# EAGLE board holo clock attiny with buttons rotate 90 (EAGLE 6.2)
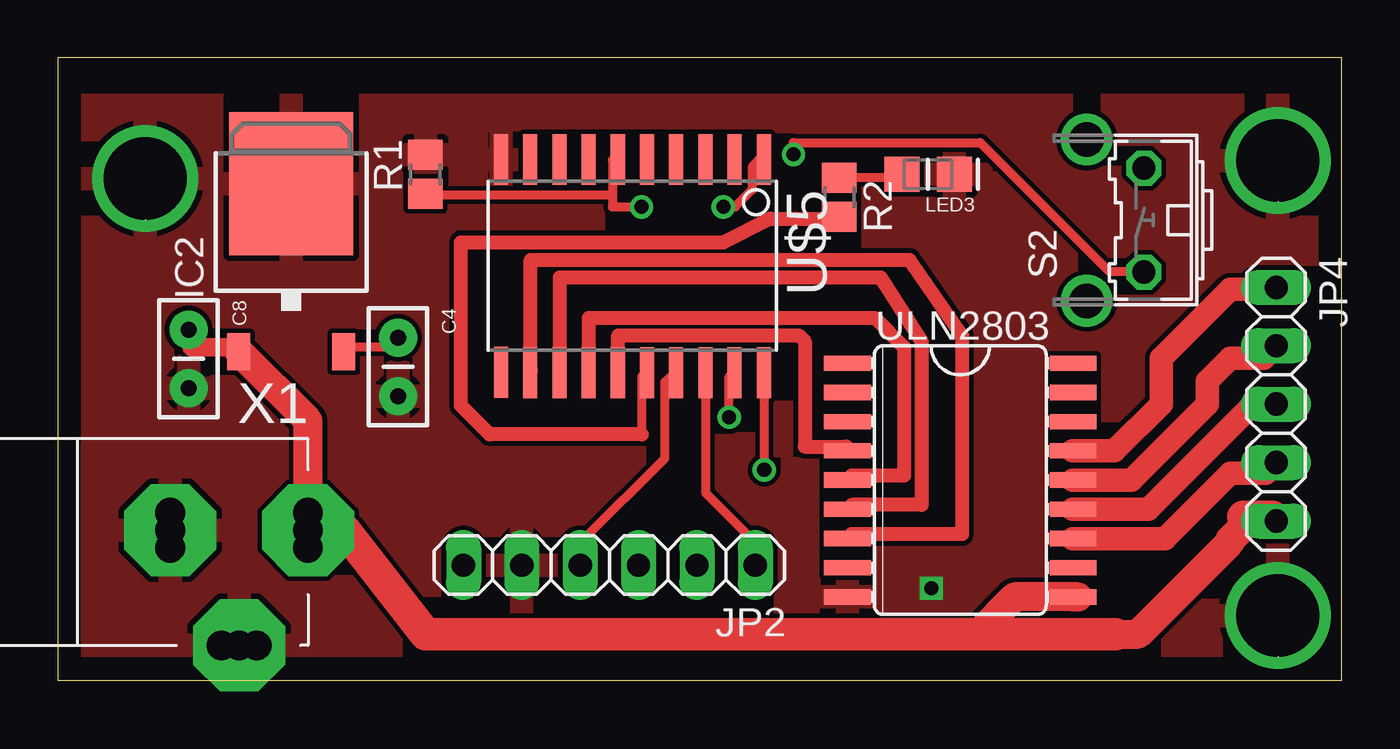
[diagram p0: board, top side]
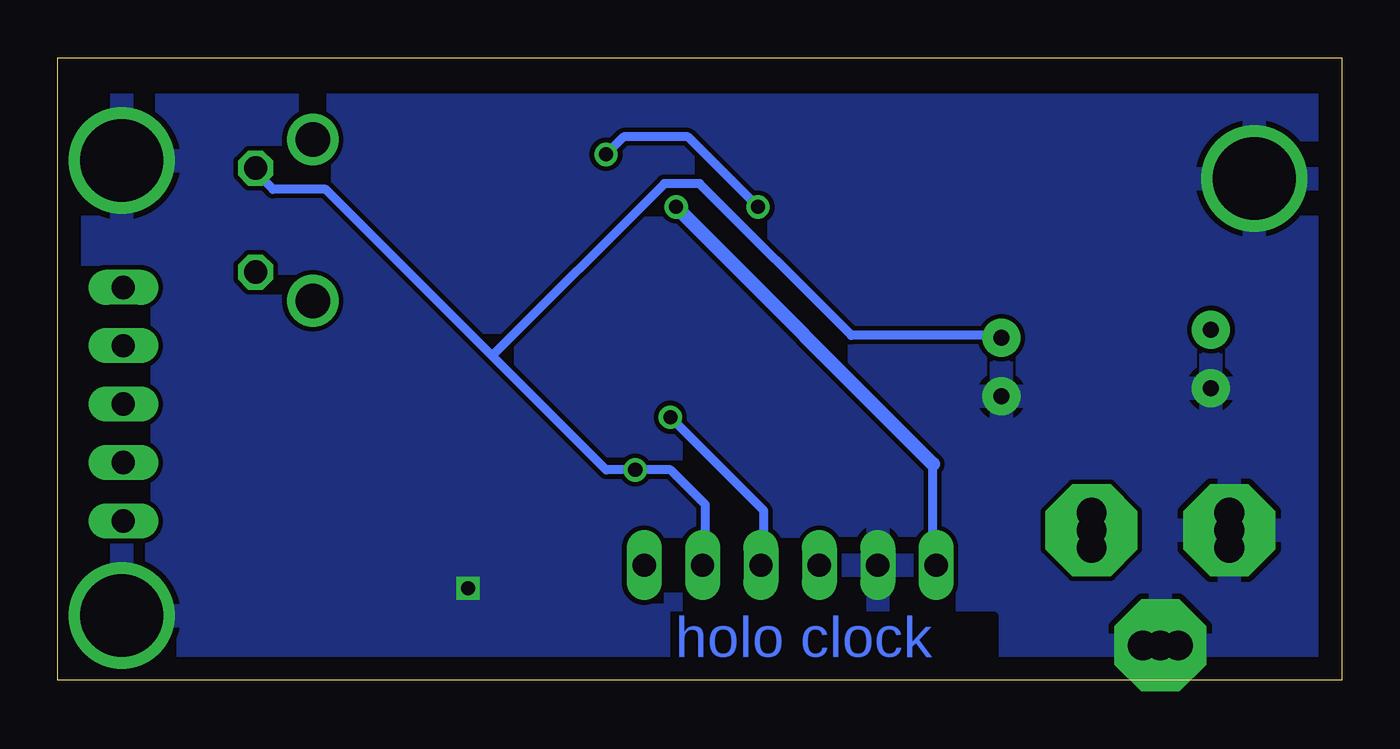
[diagram p1: board, bottom side, seen from below]

Size 55.86 x 27.07 mm. Coordinates in mm from the lower left corner, seen from the top.
Outline: 0,0 55.86,0 55.86,27.07 0,27.07 0,0
Copper layers (1*16): Top 0.035mm / dielectric 1.5mm / Bottom 0.035mm
Design rules: minimum track width 15mil, minimum drill 24mil, track to track 8mil, track to pad 8mil, pad to pad 8mil, via to via 8mil, smd to smd 8mil, copper to edge 40mil, drill to drill 8mil, minimum pad ring 10mil, minimum via ring 8mil, stop-mask expansion 4mil, vias tented up to drill 0mil, thermal gap 10mil

## Footprints (pad centres in the part's own frame; a part is rotated, then mirrored left to right if it is on the bottom)
CAP-PTH-SMALL2 = drill 0.7 pad 1.651: 1 0,0; 2 2.54,0
TO252 = smd 1 x 1.6: 1 -2.28,-4.8; 2 2.28,-4.8 | smd 5.4 x 6.2: 3 0,2.5
1X06 = drill 1.016 long: 1 -6.35,0; 2 -3.81,0; 3 -1.27,0; 4 1.27,0; 5 3.81,0; 6 6.35,0
1X05 = drill 1.016 long: 1 -5.08,0; 2 -2.54,0; 3 0,0; 4 2.54,0; 5 5.08,0
LED0805 = smd 1.524 x 1.524: 1 0,0; 2 2.286,0
R0805 = smd 1.3 x 1.5: 1 -0.85,0; 2 0.85,0
B3F-31XX = drill 1.016 octagon: 1 -2.261,-1.245; 2 2.261,-1.245 | drill 1.499 pad 2.159: 3 -3.505,1.245; 4 3.505,1.245
SO20L$ = smd 0.61 x 2.21: 1 -5.715,-4.636; 2 -4.445,-4.636; 3 -3.175,-4.636; 4 -1.905,-4.636; 5 -0.635,-4.636; 6 0.635,-4.636; 7 1.905,-4.636; 8 3.175,-4.636; 9 4.445,-4.636; 10 5.715,-4.636; 11 5.715,4.61; 12 4.445,4.636; 13 3.175,4.636; 14 1.905,4.636; 15 0.635,4.636; 16 -0.635,4.636; 17 -1.905,4.636; 18 -3.175,4.636; 19 -4.445,4.636; 20 -5.715,4.636
PLATEDSCREW = drill 3.6: GND 0,0
SO18L = smd 0.66 x 2.032: 1 -5.08,-4.902; 2 -3.81,-4.902; 3 -2.54,-4.902; 4 -1.27,-4.902; 5 0,-4.902; 6 1.27,-4.902; 7 2.54,-4.902; 8 3.81,-4.902; 9 5.08,-4.902; 10 5.08,4.902; 11 3.81,4.902; 12 2.54,4.902; 13 1.27,4.902; 14 0,4.902; 15 -1.27,4.902; 16 -2.54,4.902; 17 -3.81,4.902; 18 -5.08,4.902
POWERSUPPLY_DC-21MM = drill 1.3 pad 4 octagon: 1 -5.08,-3.353; 2 -0.076,-6.35; 3 -0.076,-0.356 | drill 1.3: 4 -5.08,-4.115; 5 -5.08,-2.591; 6 -0.838,-0.356; 7 0.686,-0.356; 8 -0.838,-6.35; 9 0.686,-6.35

## Placement (x,y rotation side)
C4  0.1uF  [CAP-PTH-SMALL2]  14.81,14.89 270 top
C8  0.33uF  [CAP-PTH-SMALL2]  5.7,15.24 270 top
IC2  7805DT  [TO252]  10.16,19.08 0 top
JP2  [1X06]  24,5 180 top
JP4  [1X05]  53,12 270 top
LED3  L_AMBER  [LED0805]  39,22 180 top
R1  10k  [R0805]  16,22 90 top
R2  1k  [R0805]  34,21 270 top
S2  [B3F-31XX]  46,20 90 top
U$5  TINY2313-*S*  [SO20L$]  25,18 180 top
U$14  PLATED-SCREW  [PLATEDSCREW]  53.07,22.59 0 top
U$17  PLATED-SCREW  [PLATEDSCREW]  53.07,2.81 0 top
U$18  PLATED-SCREW  [PLATEDSCREW]  3.81,21.81 0 top
ULN2803  ULN2803  [SO18L]  39.26,8.7 270 top
X1  POWERSUPPLY_DC21MMX  [POWERSUPPLY_DC-21MM]  4.54,6.59 90 top

## Library data of the parts
C4 C8 = SparkFun
IC2 = linear
JP2 JP4 = pinhead
LED3 = MySMD
R1 R2 = resistor
S2 = switch-omron; MPN: B3F-3100; OC_FARNELL: 959704; OC_NEWARK: 36M3582
U$5 = avr-7
U$14 U$17 U$18 = Sanguinololu
ULN2803 = uln2803
X1 = SmartPrj

## Nets
5V: C4.1 IC2.2 JP2.2 S2.2 U$5.20
!RESET: JP2.6 U$5.1
D1: U$5.12 ULN2803.7
D2: U$5.13 ULN2803.6
D3: U$5.14 ULN2803.5
D4: U$5.15 ULN2803.4
GND: C4.2 C8.2 IC2.3 JP2.5 LED3.1 R1.2 U$5.10 U$14.GND U$17.GND U$18.GND ULN2803.9 X1.1 X1.3
MISO: JP2.1 U$5.18
MOSI: JP2.4 U$5.17
N$1: JP4.1 ULN2803.15
N$2: R2.2 U$5.16
N$3: JP4.2 ULN2803.14
N$4: JP4.3 ULN2803.13
N$5: JP4.4 ULN2803.12
N$7: LED3.2 R2.1
N$8: R1.1 S2.1 U$5.6
PWRIN [power]: C8.1 IC2.1 JP4.5 ULN2803.10 X1.2
SCLK: JP2.3 U$5.19

## Tracks (layer width: path | path; a pad name or v marks a point on that pad's centre or on a via)
5V  (via drill 0.61)
  Top 0.381: v30.73,9.14 30.73,13.21 U$5.20 | IC2.2 12.45,14.48 14.73,14.48 14.73,14.73 C4.1
  Bottom 0.381: 36.96,14.1 32,9.14 v30.73,9.14 29.21,9.14 27.69,7.62 27.69,6.1 JP2.2 | 36.96,14.1 44.2,21.34 46.48,21.34 47.24,22.1 S2.2 | 36.96,14.1 29.46,21.59 27.94,21.59 21.34,14.99 14.99,14.99 C4.1
!RESET  (via drill 0.61)
  Top 0.381: v28.96,20.57 29.46,20.57 30.23,21.34 30.23,22.35 30.48,22.61 U$5.1
  Bottom 0.381: 17.78,9.4 17.78,6.1 JP2.6
  Bottom 0.61: 17.78,9.4 v28.96,20.57
D1
  Top 0.381: 34.54,6.35 ULN2803.7 | 20.57,13.46 U$5.12
  Top 0.61: 34.54,6.35 39.34,6.35 39.34,14.99 37.05,18.27 20.57,18.27 20.57,13.46
D2
  Top 0.381: 34.54,7.62 ULN2803.6 | 21.84,13.46 U$5.13
  Top 0.61: 34.54,7.62 37.58,7.62 37.58,14.73 35.8,17.51 21.84,17.51 21.84,13.46
D3
  Top 0.381: 34.54,8.89 ULN2803.5 | 23.11,13.46 U$5.14
  Top 0.61: 34.54,8.89 36.81,8.89 36.81,14.48 35.54,15.75 23.11,15.75 23.11,13.46
D4
  Top 0.381: 34.29,10.16 ULN2803.4 | 24.38,13.46 U$5.15
  Top 0.61: 34.29,10.16 32.5,10.16 32.5,14.73 32.24,14.99 24.38,14.99 24.38,13.46
GND  (via drill 0.6)
  other vias: 38,4
  pour Bottom: 0,25 56,25 56,21 56,0 0,0
  pour Top: 0,25 56,25 56,0 0,0
MISO
  Top 0.381: U$5.18 28.19,13.21 28.19,8.13 30.23,6.1 JP2.1
MOSI
  Top 0.381: U$5.17 26.67,13.21 26.42,12.95 26.42,9.65 22.86,6.1 JP2.4
N$1
  Top 1.016: ULN2803.15 45.97,9.97 48,12 48,14 51,17 52.92,17 JP4.1
N$2
  Top 0.381: 25.4,10.68 25.4,13.21 U$5.16 | 33.78,20.07 R2.2
  Top 0.61: 33.78,20.07 30.99,20.07 28.96,19.03 17.54,19.03 17.54,11.94 18.8,10.68 25.4,10.68
N$3
  Top 1.016: ULN2803.14 46.7,8.7 50,12 50,13 51,14 52.46,14 JP4.2
N$4
  Top 1.016: ULN2803.13 47.43,7.43 52,12 JP4.3
N$5
  Top 1.016: ULN2803.12 48.16,6.16 51,9 52.54,9 JP4.4
N$7
  Top 0.381: R2.1 34.04,21.84 36.58,21.84 LED3.2
N$8  (via drill 0.61)
  Top 0.381: 24.13,21.08 16,21.08 R1.1 | 24.13,21.08 24.13,22.61 U$5.6 | v32,22.86 32,23.37 40.13,23.37 45.72,17.78 47.24,17.78 S2.1 | v25.4,20.57 24.13,20.57 24.13,21.08
  Bottom 0.381: v32,22.86 31.24,23.62 28.45,23.62 v25.4,20.57
PWRIN
  Top 0.381: 5.84,14.48 5.84,15.24 C8.1 | 52.83,7.11 JP4.5 | ULN2803.10 44.2,3.81 44.2,3.62
  Top 0.813: 5.84,14.48 7.87,14.48 IC2.1
  Top 1.27: X1.2 10.89,11.27 IC2.1 | 46,2 47,2 51,6 51,6.11 52,7.11 | 44.38,3.62 44.2,3.62 ULN2803.10 41.62,3.62 40,2
  Top 1.422: 52.83,7.11 52,7.11 51.56,7.11 | X1.2 12.49,6.51 16,2 40,2 46,2
SCLK  (via drill 0.61)
  Top 0.381: v29.21,11.43 29.21,13.21 U$5.19
  Bottom 0.381: v29.21,11.43 25.15,7.37 25.15,6.1 JP2.3

## Text on the board
Bottom: holo clock